# Altium PCB Encoder_adapter.PcbDoc
Units mil, origin at the board's own origin, x right, y up, seen from the top; angles counter-clockwise.
Board outline 1335 x 1635 mil, 2 copper layers (Top Layer, Bottom Layer); 6 components, 12 nets, 38 pads, 6 vias.
Unrouted connection lines stored in the file: 1.
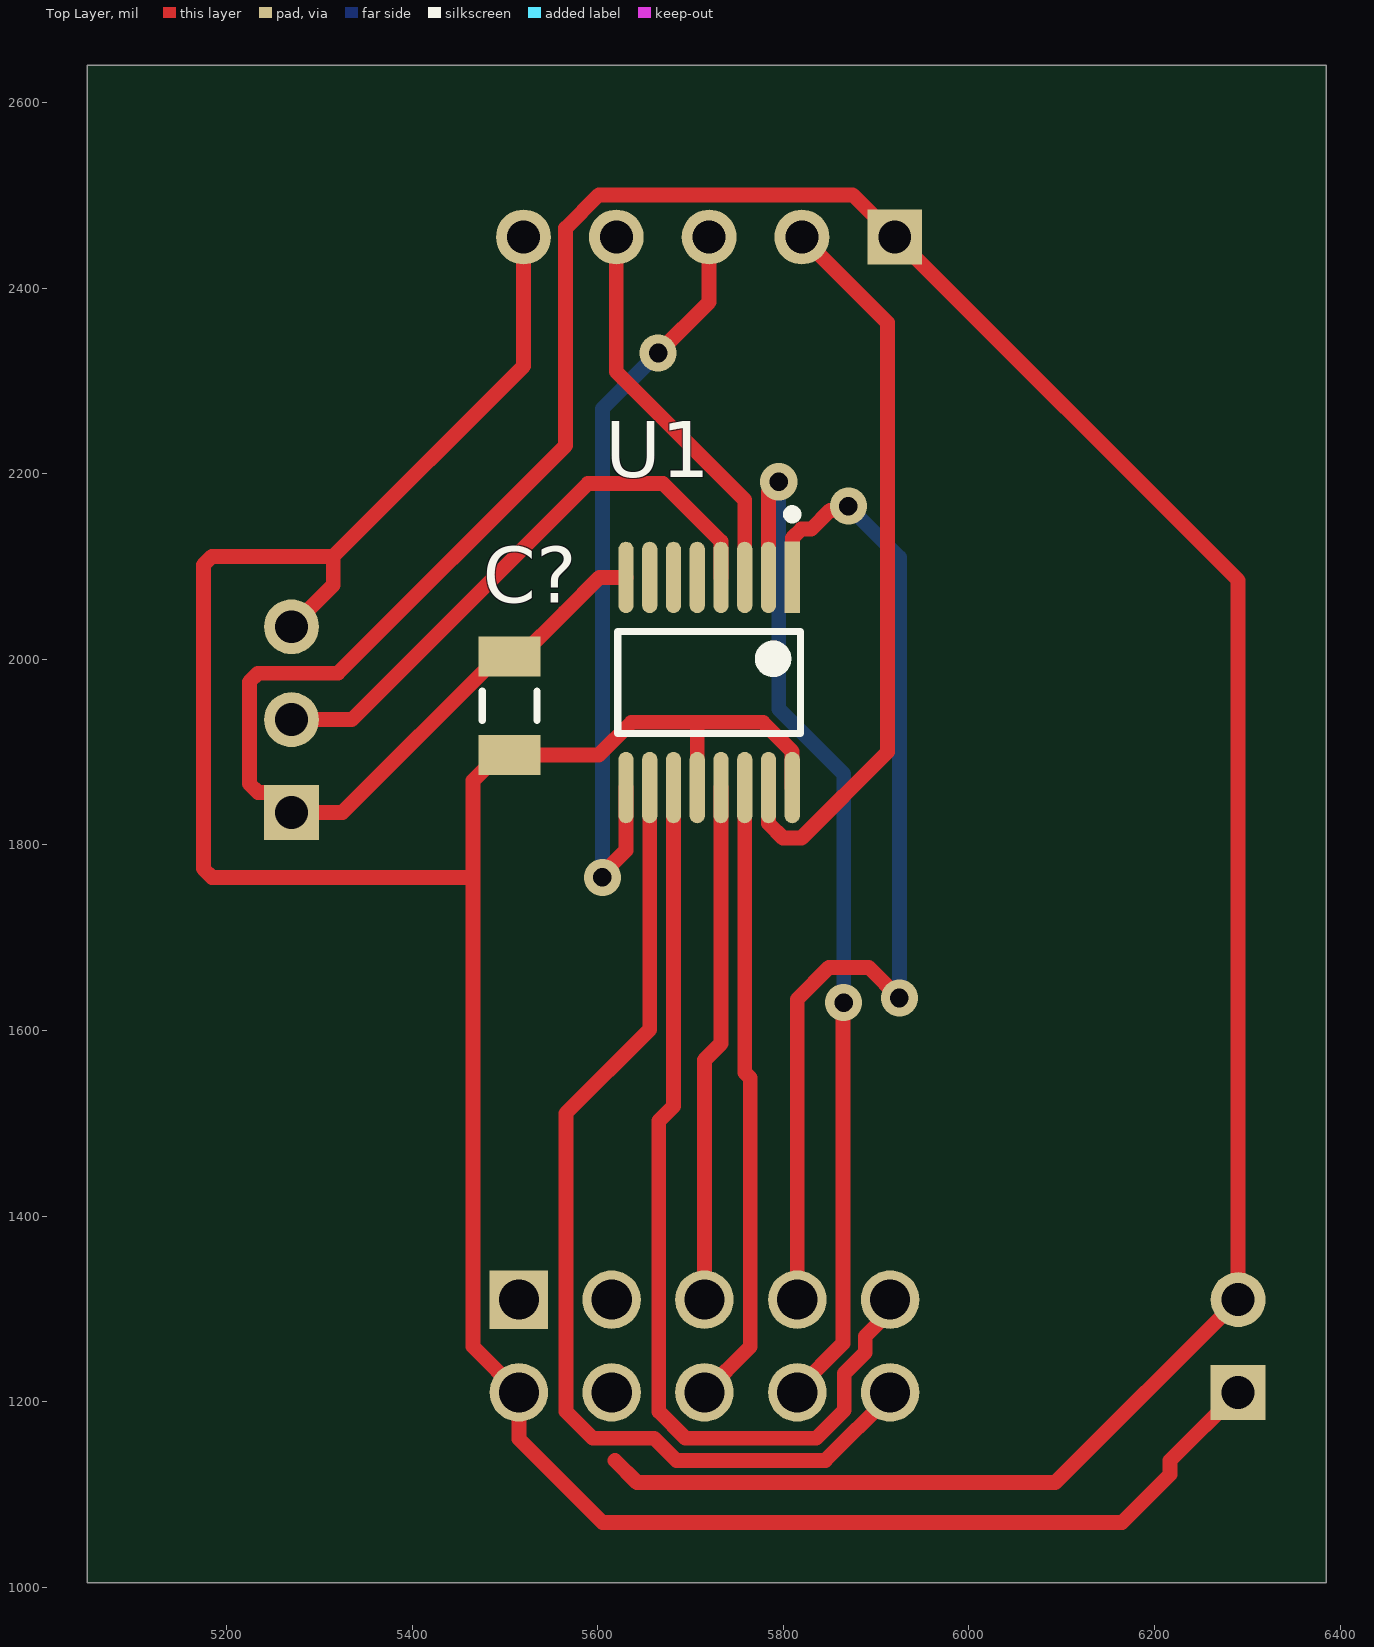
[diagram p0: Top Layer view]
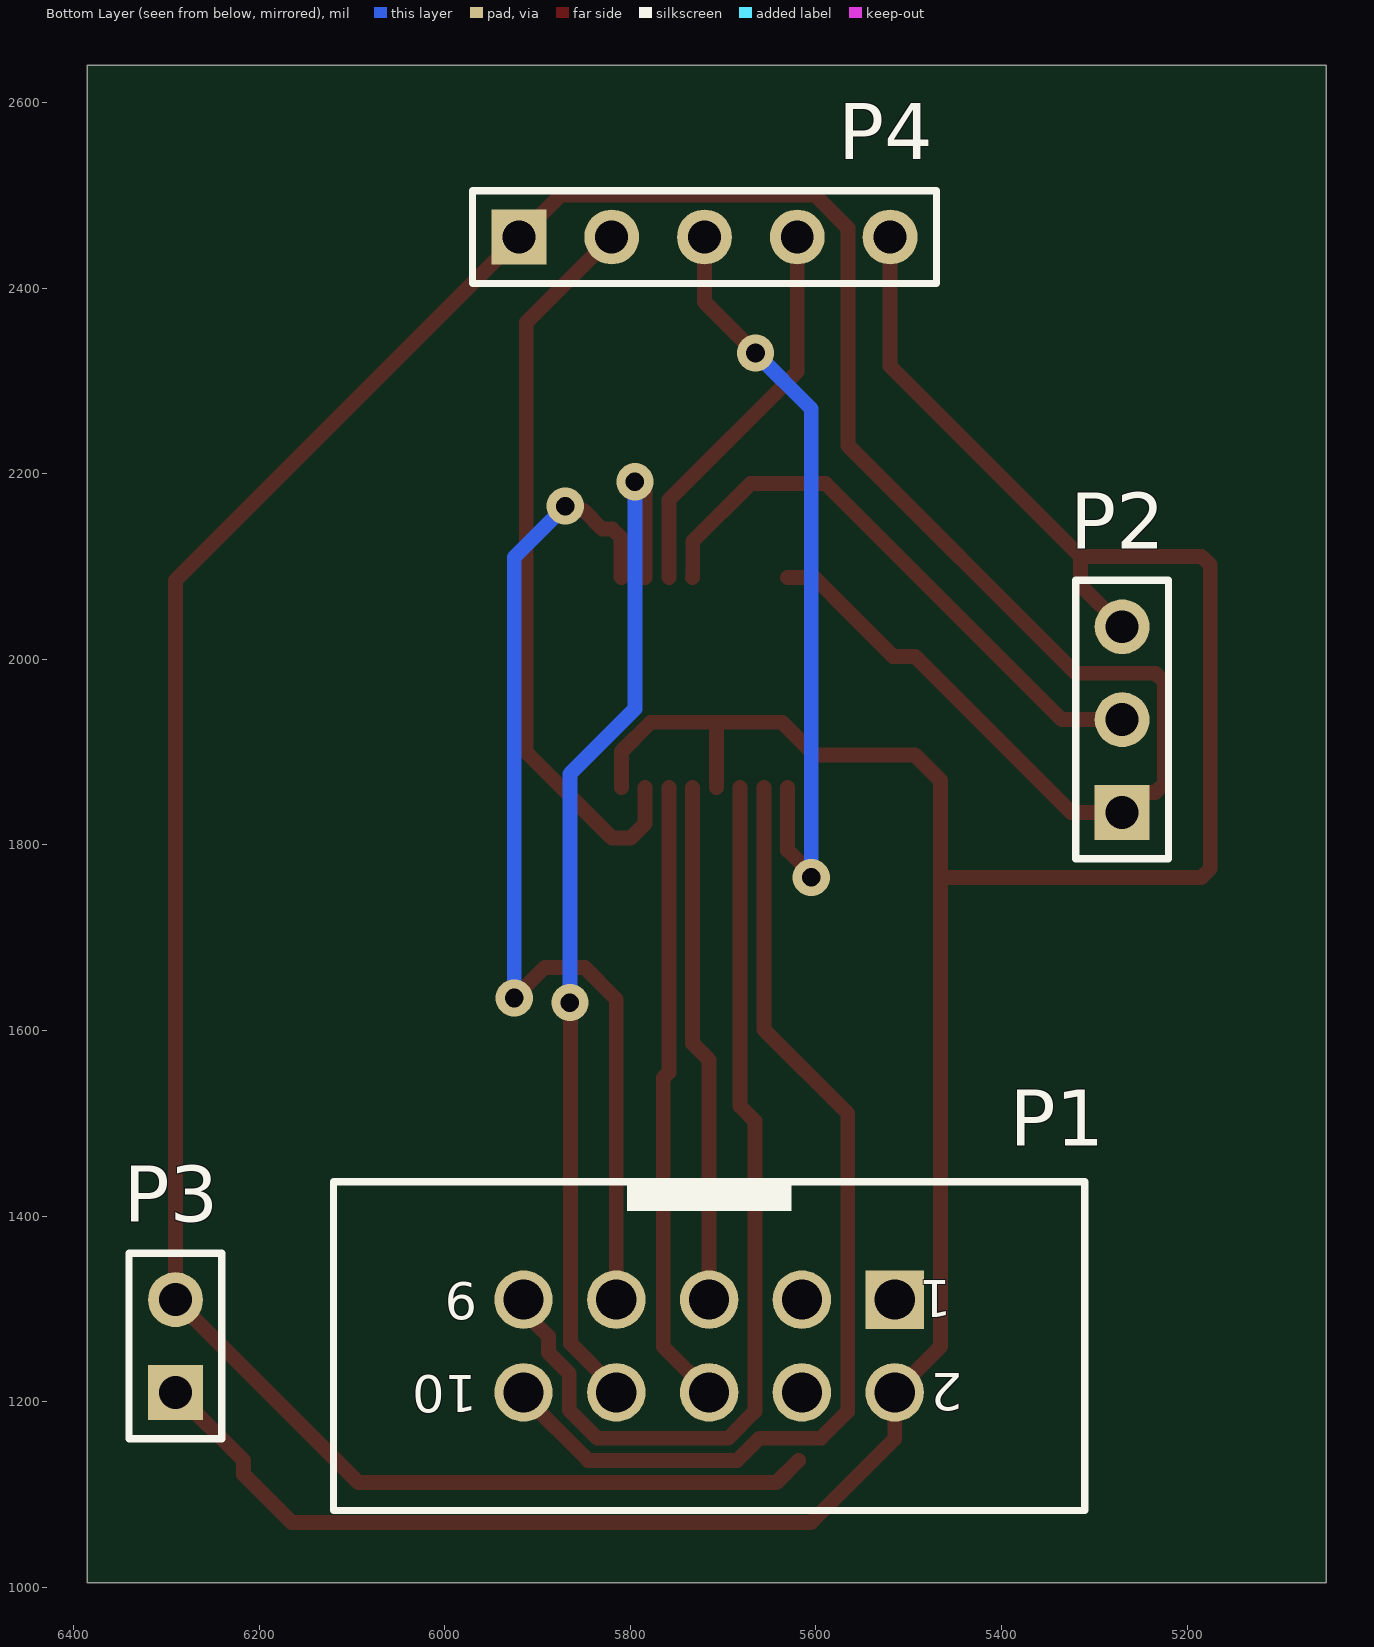
[diagram p1: Bottom Layer view, seen from below]

## Layer stack, top to bottom
Top Solder: solder mask 0.4, Solder Resist, Dk 3.5
Top Layer: signal copper 1.4
Dielectric 1: dielectric 12.6, FR-4, Dk 4.8
Bottom Layer: signal copper 1.4
Bottom Solder: solder mask 0.4, Solder Resist, Dk 3.5

## Board outline
5050,1005 5050,2640 6385,2640 6385,1005

## Design rules (kind name [scope] priority, off if disabled: settings)
Clearance [All] p1: gap=10 ignorepadtopadclearanceinfootprint=FALSE except(5.91: SMDPad-SMDPad SMDPad-THPad SMDPad-Via SMDPad-Fill SMDPad-Poly SMDPad-Region SMDPad-Text; 7.87: Arc-Arc Arc-Track Arc-SMDPad Arc-THPad Track-Track Track-SMDPad Track-THPad; 19.68: Arc-Hole Track-Hole SMDPad-Hole THPad-Hole Via-Hole Fill-Hole Poly-Hole Region-Hole Text-Hole)
ComponentClearance [All] p1: gap=3.94 collisioncheckmode=3 verticalgap=3.94 showdistances=FALSE
DiffPairsRouting [All] p1: maxlimit=10 minlimit=7.87 mostfreqgap=7.87 toplayer_minwidth=13 toplayer_maxwidth=13 toplayer_prefwidth=13 bottomlayer_minwidth=13 bottomlayer_maxwidth=13 bottomlayer_prefwidth=13 maxuncoupledlength=500
HoleSize [All] p1: absolutevalues=TRUE maxlimit=157.48 minlimit=1 maxpercent=80.000 minpercent=20.000
MinimumSolderMaskSliver [All] p1: minsoldermaskwidth=7.87
PolygonConnect [All] p1: thpad.connectstyle=Relief thpad.reliefconductorwidth=10 thpad.reliefentries=4 thpad.polygonreliefangle="90 Angle" thpad.airgapwidth=10 smdpad.connectstyle=Relief smdpad.reliefconductorwidth=10 smdpad.reliefentries=4 smdpad.polygonreliefangle="90 Angle" smdpad.airgapwidth=10 via.connectstyle=Direct via.reliefconductorwidth=10 via.reliefentries=4 via.polygonreliefangle="90 Angle" via.airgapwidth=10
RoutingVias [All] p1: holewidth=13.78 width=29.53 viastyle="Through Hole" minholewidth=7.87 minwidth=19.68 maxholewidth=27.56 maxwidth=39.37
SMDNeckDown [All] p1: percent=90.000
SilkToSilkClearance [All] p1: silktosilkclearance=7.87
SilkToSolderMaskClearance [IsPad] p1: minsilkscreentomaskgap=7.87 clearancetoexposedcopper=TRUE
SolderMaskExpansion [All] p1: expansion=4 istentingtop=FALSE useseparateexpansions=TRUE expansionbottom=4 istentingbottom=FALSE
Width [All] p1: maxlimit=16 minlimit=7.87 preferedwidth=11.81
Width Width_Differential [InNetClass('SIGNAL')] p2: maxlimit=15 minlimit=5.3 preferedwidth=13.03 impedanceprofiledriven=TRUE impedanceprofileid={12B866CA-FE4E-4F91-8C1C-2824152DAA23} minimp=50.000000 maximp=50.000000 favimp=50.000000
Width Width_Power [InNetClass('POWER')] p3: maxlimit=39.37 minlimit=9.84 preferedwidth=19.68
24 further rules are at their usual default settings.

## Components (designator, comment, footprint, x,y, rotation, side; value= is the part's Value field where it differs from the comment)
C? "Cap Semi" C1206 5505,1950 r90 top value=100pF (schematic designator C1)
P1 "61201021621" 61201021621 5715,1260 r0 bottom
P2 "Header 3" HDR1X3 5270,1835 r90 bottom
P3 "Header 2" HDR1X2 6290,1210 r90 bottom
P4 "Header 5" HDR1X5 5920,2455 r180 bottom
U1 "SN65C1168EPWR" FP-PW0016A-IPC_A 5720,1975 r270 top

## Footprints (in the part's own frame and the unit in brackets; to place one, negate y for a bottom-side part, rotate by r counter-clockwise, add the part's x,y. Pads: shape width x height; smd on the part's side, far side on the other; paste and mask are expansions set on the pad)
61201021621 [mm] "10 pins, straight, gold plating"
  rect 1.6x1.6 hole 1.1: 1(-5.08,-1.27)
  round 1.6 hole 1.1: 2(-5.08,1.27) 3(-2.54,-1.27) 4(-2.54,1.27) 5(0,-1.27) 6(0,1.27) 7(2.54,-1.27) 8(2.54,1.27) 9(5.08,-1.27) 10(5.08,1.27)
  silkscreen extent -10.28,-4.5 10.28,4.5, body extent -10.18,-4.42 10.18,4.75, height 9.13
C1206 [mm] "Chip Capacitor, Body 3.2x1.6mm, IPC High Density"
  rect 1.1x1.7 smd: 1(-1.35,0) 2(1.35,0)
  silkscreen extent -0.4,-0.75 0.4,0.75, body extent -1.7,-0.9 1.7,0.9, height 1.3
FP-PW0016A-IPC_A [mm] "QFN, 16-Leads, Body 4x3.5mm, Thermal Pad 2.55x2.05mm, TI Recommend"
  rect 1.955x0.421 smd paste+0 mask+0: 1(-2.875,2.275)
  rrect100% 1.955x0.421 smd paste+0 mask+0: 2(-2.875,1.625) 3(-2.875,0.975) 4(-2.875,0.325) 5(-2.875,-0.325) 6(-2.875,-0.975) 7(-2.875,-1.625) 8(-2.875,-2.275) 9(2.875,-2.275) 10(2.875,-1.625) 11(2.875,-0.975) 12(2.875,-0.325) 13(2.875,0.325) 14(2.875,0.975) 15(2.875,1.625) 16(2.875,2.275)
  silkscreen extent -4.73,-2.5 1.4,2.5, body extent -4.35,-3 4.35,3, height 0.25
HDR1X2 [mm] "Connector; Header; 2 Position"
  rect 1.5x1.5 hole 0.9: 1(0,0)
  round 1.5 hole 0.9: 2(2.54,0)
  silkscreen extent -1.27,-1.27 3.81,1.27
HDR1X3 [mm] "Connector; Header; 3 Position"
  rect 1.5x1.5 hole 0.9: 1(0,0)
  round 1.5 hole 0.9: 2(2.54,0) 3(5.08,0)
  silkscreen extent -1.27,-1.27 6.35,1.27
HDR1X5 [mm] "Connector; Header; 5 Position"
  rect 1.5x1.5 hole 0.9: 1(0,0)
  round 1.5 hole 0.9: 2(2.54,0) 3(5.08,0) 4(7.62,0) 5(10.16,0)
  silkscreen extent -1.27,-1.27 11.43,1.27

## Part data
C?: "Capacitor (Semiconductor SIM Model)", LatestRevisionDate=29-May-2009, LatestRevisionNote="IPC-7351 Footprint Added.", PackageDescription="Chip Capacitor", PackageReference=C1206, Published=8-Jun-2000, Publisher="Altium Limited"
P1: library part CMP-1502-00007-1, "Male Box Header WR-BHD, THT, Vertical, pitch 2.54 mm, 10 pins", Contact Resistance=20mOhm, Manufacturer="Wurth Elektronik", Operating Temperature=-40to125degC, Withstanding Voltage=500VAC, Working Voltage=250VAC, Datasheet URL=https://katalog.we-online.de/em/datasheet/6120xx21621.pdf, Gender=Male, Manufacturer URL=http://www.we-online.de, Mounting Technology=THT, Orientation=Vertical, Package Reference=61201021621, Packaging=Tray, Part Number=61201021621, Pin Number=10, Pitch=2.54mm, Published Date=August2018, Publisher=WurthElektronik
P2: "Header, 3-Pin", LatestRevisionDate=17-Jul-2002, LatestRevisionNote="Re-released for DXP Platform.", Publisher="Altium Limited"
P3: "Header, 2-Pin", LatestRevisionDate=17-Jul-2002, LatestRevisionNote="Re-released for DXP Platform.", Publisher="Altium Limited"
P4: "Header, 5-Pin", LatestRevisionDate=17-Jul-2002, LatestRevisionNote="Re-released for DXP Platform.", Publisher="Altium Limited"
U1: library part CMP-0310-00131-3, "None", Case/Package="VQFN EP", Max Operating Temperature=85°C, Max Supply Voltage=5.5V, Min Operating Temperature=-40°C, Min Supply Voltage=4.5V, Nominal Supply Current=9mA, Operating Supply Voltage=5V, Output Current=20uA, Output Voltage=3.5V, Package Quantity=1, Data Rate=10Mbps, Lead Free="Lead Free", Logic Function=Transceiver, Number of Drivers=2, Number of Pins=16, Number of Receivers=2, Number of Transceivers=1, Number of Transmitters=2, Operating Supply Current=9mA, Packaging="Tape and Reel", Propagation Delay=8ns, Radiation Hardening=No, RoHS Compliant=Yes, Series=-, Supply Current=9mA, Weight=0.001312oz

## Via types
v1: diameter 40, hole 20, Top Layer to Bottom Layer, 6 vias

## Nets (pads, with @x,y where several pads share a name; then routed paths per layer and width w, separated by ;. In a path a pad name is that pad's centre, name@x,y a point inside that pad or via, vN(x,y) a via of type N, cw(c..) or ccw(c..) an arc to the next point about the centre after c; other vN are vias at no path point)
+5: C?.1 P1.2 P2.3 P3.1 P4.5 U1.12 U1.16 | length 3390.2
  Top Layer w16: P2.3 5315,2080 5315,2110.9 ; P4.5 5520,2315.9 5315,2110.9 ; U1.12 5707.2,1932.2 ; U1.16 5809.46,1861.9 5809.46,1900.69 5777.94,1932.2 5636.47,1932.2 5601.11,1896.85 C?.1 5493.19,1896.85 5465.66,1869.32 5465.66,1765 ; P3.1 6216.74,1136.74 6216.74,1121.74 6165,1070 5605,1070 5515,1160 P1.2 5465.66,1259.34 5465.66,1765 ; 5315,2110.9 5184.37,2110.9 5175,2101.53 5175,1774.37 5184.37,1765 5465.66,1765
A/SCLK_N: P1.5 U1.13 | length 559.2
  Top Layer w16: P1.5 5715,1568.18 5732.8,1585.97 U1.13
A/SCLK_P: P1.6 U1.14 | length 674.7
  Top Layer w16: P1.6 5764.34,1259.34 5764.34,1548.77 5758.39,1554.72 U1.14
B/MISO_N: P1.7 U1.1 | length 1131.4
  Top Layer w16: U1.1 5809.85,2088.49 5809.85,2130.82 5819.22,2140.19 5830,2140.19 5850.21,2160.41 5865.41,2160.41 v1(5870,2165) ; P1.7 5815,1633.74 5849.26,1668 5892,1668 v1(5925,1635)
  Bottom Layer w16: v1(5870,2165) 5925,2110 v1(5925,1635)
B/MISO_P: P1.8 U1.2 | length 1138.9
  Top Layer w16: U1.2@5784.08,2088.31 U1.2 5783.98,2180.32 v1(5795,2191.34) ; P1.8 5815,1213.54 5864.34,1262.88 5864.34,1629.34 v1(5865,1630)
  Bottom Layer w16: v1(5795,2191.34) 5795,1946.42 5865,1876.42 v1(5865,1630)
GND: C?.2 P1.3 P2.1 P3.2 P4.1 U1.8 | length 3772.6
  Top Layer w16: P1.3@5608.48,1303.48 P1.3 ; 5618.44,1136.79 5642.31,1112.91 6092.91,1112.91 P3.2 6290,2085 P4.1 5874.6,2500.4 5601.19,2500.4 5565.4,2464.61 5565.4,2230.4 5320,1985 5233.97,1985 5224.6,1975.63 5224.6,1865.9 5233.97,1856.53 5248.47,1856.53 P2.1 5325.04,1835 5493.19,2003.15 C?.2 5516.81,2003.15 5564.31,2050.65 5601.87,2088.2 U1.8
MISO: P4.4 U1.3 | length 424.1
  Top Layer w16: P4.4 5620,2310 5758.39,2171.61 U1.3
MOSI: P4.3 U1.9 | length 845.1
  Top Layer w16: v1(5605,1765) 5605,1768.66 5630.43,1794.09 U1.9 U1.9@5630.54,1861.9 ; v1(5665,2330) 5720,2385 P4.3
  Bottom Layer w16: v1(5605,1765) 5605,2270 v1(5665,2330)
NetP2_2: P2.2 U1.4 | length 632.7
  Top Layer w16: P2.2 5335,1935 5589.31,2189.31 5670.47,2189.31 5732.69,2127.09 5732.69,2088.31 U1.4
SCLK: P4.2 U1.15 | length 804.9
  Top Layer w16: U1.15 5784.08,1861.69 5784.08,1822.91 5799.56,1807.43 5819.57,1807.43 5912.09,1899.94 5912.09,2362.91 P4.2
Z/MOSI_N: P1.9 U1.11 | length 1042.9
  Top Layer w16: U1.11 5681.61,1518.42 5665.66,1502.47 5665.66,1189.56 5694.56,1160.66 5835.44,1160.66 5865.66,1190.89 5865.66,1230.44 5888.21,1252.99 5888.21,1270.5 5915,1297.28 P1.9
Z/MOSI_P: P1.10 U1.10 | length 1113.3
  Top Layer w16: U1.10 5656.02,1601.02 5565.66,1510.66 5565.66,1189.56 5594.56,1160.66 5660.8,1160.66 5684.67,1136.79 5845.33,1136.79 5915,1206.46 P1.10
pads on no net: P1.1 P1.4 U1.5 U1.6 U1.7

## Silkscreen, mask and mechanical layers (free items; w line width, h text height)
Mechanical 1:
  the board outline again, w10

## Text inside footprints (layer, text, board x,y; h text height)
P1: Bottom Overlay "9" at 5964.61,1328.5 h40 r180; Bottom Overlay "10" at 5964.61,1228.5 h40 r180; Bottom Overlay "2" at 5441.77,1230.87 h40 r180; Bottom Overlay "1" at 5453.58,1330.87 h40 r180